# Altium PCB EPROM_Programmer.PcbDoc
Units mil, origin at the board's own origin, x right, y up, seen from the top; angles counter-clockwise.
Board outline 6000 x 4000 mil, 2 copper layers (Top Layer, Bottom Layer); 108 components, 102 nets, 375 pads, 0 vias.
Unrouted connection lines stored in the file: 239.
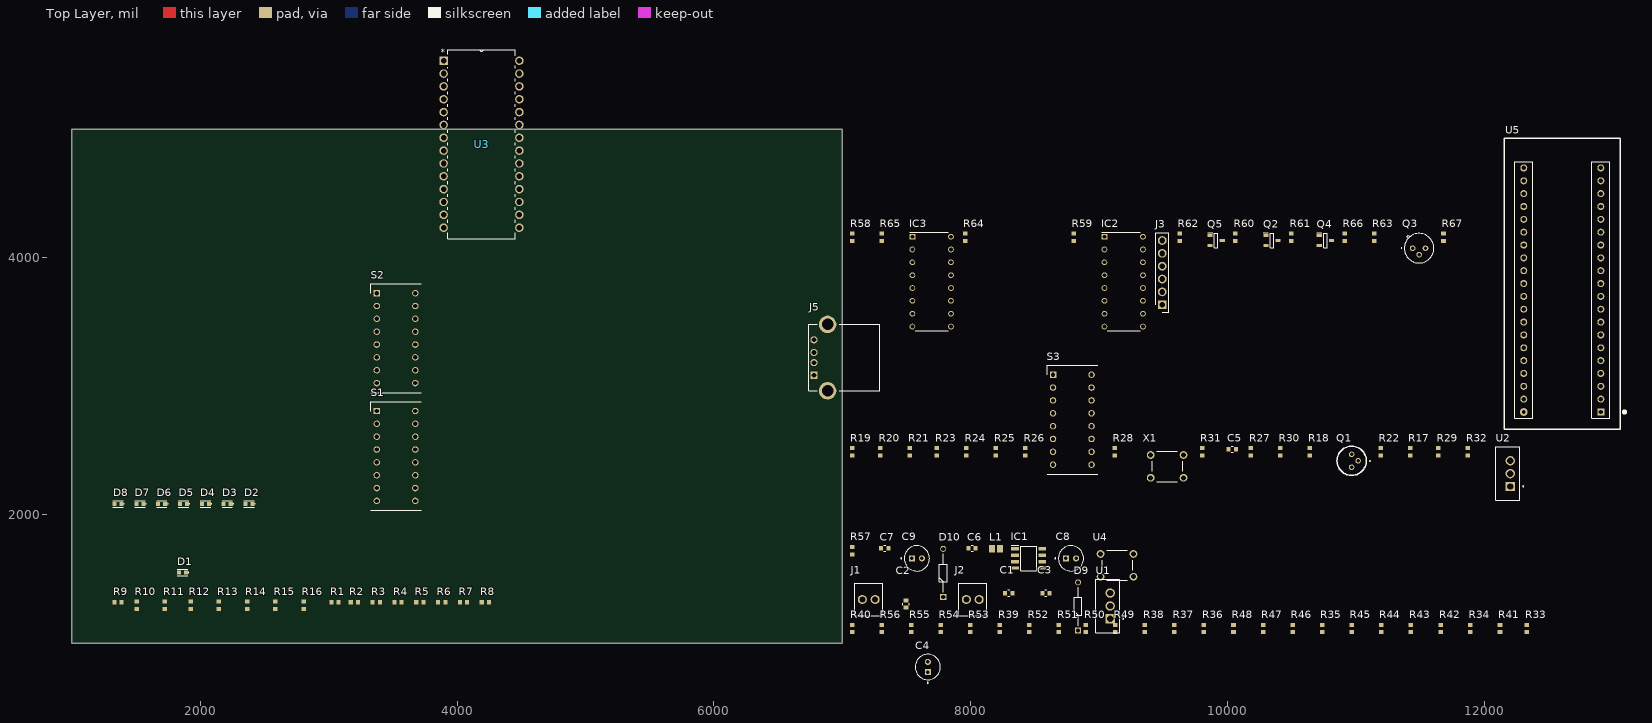
[diagram p0: Top Layer view]
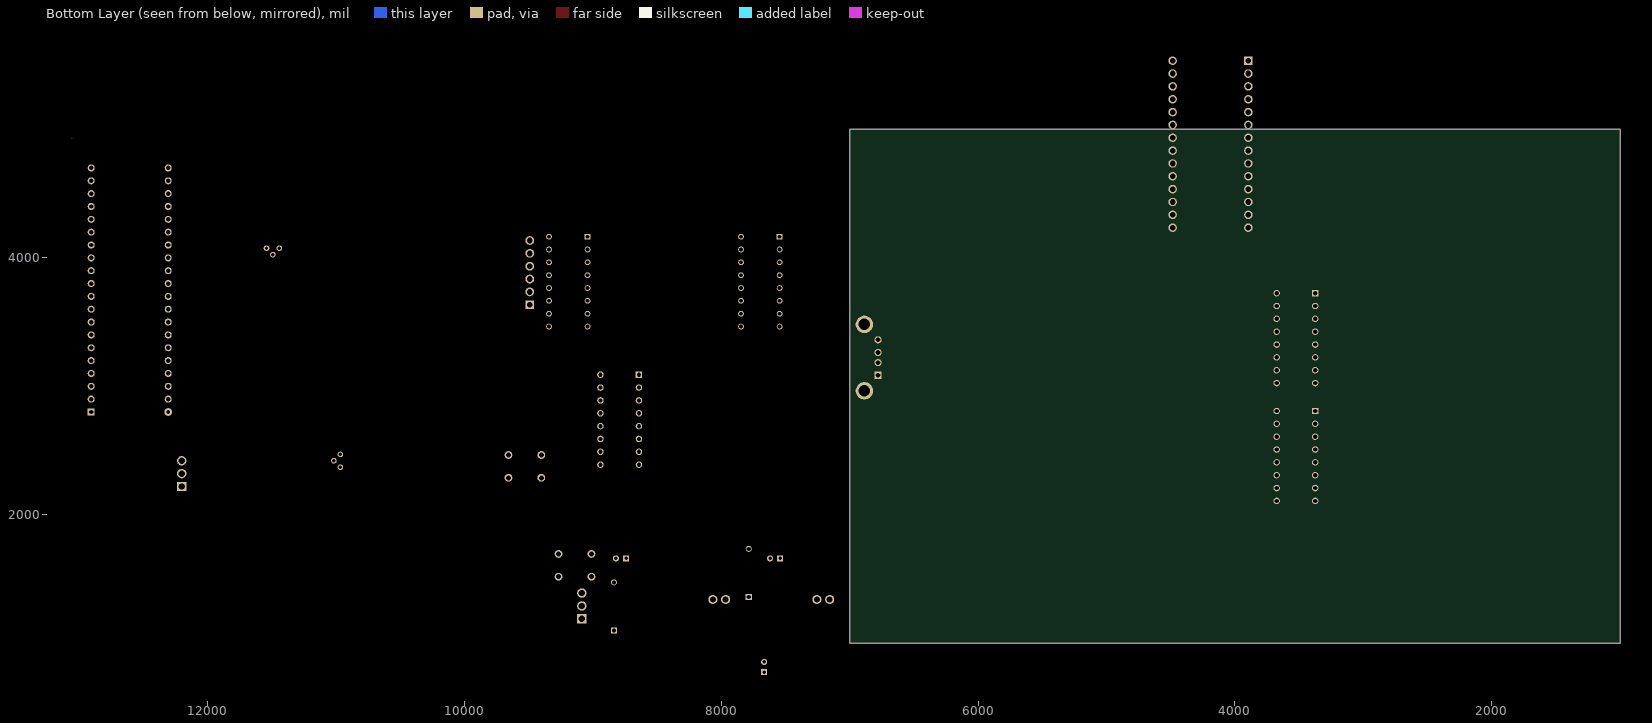
[diagram p1: Bottom Layer view, seen from below]

## Layer stack, top to bottom
Top Solder: solder mask 0.4, Solder Resist, Dk 3.5
Top Layer: signal copper 1.4
Dielectric 1: dielectric 12.6, FR-4, Dk 4.8
Bottom Layer: signal copper 1.4
Bottom Solder: solder mask 0.4, Solder Resist, Dk 3.5

## Board outline
1000,1000 7000,1000 7000,5000 1000,5000

## Design rules (kind name [scope] priority, off if disabled: settings)
Clearance [All] p1: gap=10 ignorepadtopadclearanceinfootprint=FALSE
PolygonConnect [All] p1: connectstyle=Relief reliefconductorwidth=10 reliefentries=4 polygonreliefangle="90 Angle" airgapwidth=10
RoutingVias [All] p1: holewidth=28 width=50 viastyle="Through Hole" minholewidth=28 minwidth=50 maxholewidth=28 maxwidth=50
SolderMaskExpansion [All] p1: expansion=4 istentingtop=FALSE
SupplyNets "Schematic Supply Nets_7" [InNet('+9v')] p1: voltage=0.000
SupplyNets "Schematic Supply Nets_6" [InNet('VIN')] p2: voltage=0.000
SupplyNets "Schematic Supply Nets_5" [InNet('+5 or +6')] p3: voltage=0.000
SupplyNets "Schematic Supply Nets_4" [InNet('VCC')] p4: voltage=0.000
SupplyNets "Schematic Supply Nets_3" [InNet('5V')] p5: voltage=0.000
SupplyNets "Schematic Supply Nets_2" [InNet('+12')] p6: voltage=0.000
SupplyNets "Schematic Supply Nets_1" [InNet('+5')] p7: voltage=0.000
Width [All] p1: maxlimit=10 minlimit=10 preferedwidth=10
30 further rules are at their usual default settings.

## Classes and differential pairs
component class EPROM_Programmer_3: IC2 IC3 J3 J5 Q2 Q3 Q4 Q5 R58 R59 R60 R61 R62 R63 R64 R65 R66 R67 U5
component class EPROM_Programmer_2: C3 C4 C5 C6 C7 C8 C9 D10 IC1 L1 Q1 R17 R18 R19 R20 R21 R22 R23 R24 R25 R26 R27 R28 R29 R30 R31 R32 R57 S3 U2 U4 X1
component class EPROM_Programmer: C1 C2 D1 D2 D3 D4 D5 D6 D7 D8 D9 J1 J2 R1 R2 R3 R4 R5 R6 R7 R8 R9 R10 R11 R12 R13 R14 R15 R16 R33 R34 R35 R36 R37 R38 R39 R40 R41 R42 R43 R44 R45 R46 R47 R48 R49 R50 R51 R52 R53 R54 R55 R56 S1 S2 U1 U3

## Components (designator, comment, footprint, x,y, rotation, side; value= is the part's Value field where it differs from the comment)
C1 "0.33uF" C0603 8295,1390 r0 top value=100pF
C2 "0.1uF" C0603 7495,1305 r90 top value=100pF
C3 "0.1uF" C0603 8585,1390 r0 top value=100pF
C4 "1uF" CAPPRD200W50D550H1250 7665,814.37 r90 top
C5 "10uF" C0603 10035,2510 r0 top value=100pF
C6 "47nF" C0603 8010,1740 r0 top value=100pF
C7 "1nF" C0603 7330,1740 r0 top value=100pF
C8 "33uF" CAPPRD200W50D550H1250 8780,1660 r0 top
C9 "33uF" CAPPRD200W50D550H1250 7580,1660 r0 top
D1 "LED_SMD" 0603_LED 1862.44,1550 r0 top value=RED
D2 "LED_SMD" 0603_LED 2380,2085 r0 top value=RED
D3 "LED_SMD" 0603_LED 2210,2085 r0 top value=RED
D4 "LED_SMD" 0603_LED 2040,2085 r0 top value=RED
D5 "LED_SMD" 0603_LED 1870,2085 r0 top value=RED
D6 "LED_SMD" 0603_LED 1700,2085 r0 top value=RED
D7 "LED_SMD" 0603_LED 1530,2085 r0 top value=RED
D8 "LED_SMD" 0603_LED 1360,2085 r0 top value=RED
D9 "SD103A-TR" DIOAD950W60L350D150 8835,1100 r90 top
D10 "1N5817" DIOAD950W60L350D150 7785,1360 r90 top
IC1 "MAX734CSA+" SOIC127P600X175-8N 8450,1660 r0 top
IC2 "74HC595N" DIP762W53P254L1902H420Q16N 9190,3815 r0 top
IC3 "74HC595N" DIP762W53P254L1902H420Q16N 7695,3815 r0 top
J1 "1546215-2" 15462152 7155,1340 r0 top
J2 "1546215-2" 15462152 7965,1340 r0 top
J3 "M20-9990645" HDRV6W66P0X254_1X6_1524X254X874P 9490,3635 r90 top
J5 "61400416021" 61400416021 7014.13,3223.66 r90 top
L1 "Inductor" 2029 8195,1735 r0 top value=18uH
Q1 "2N2222A" TO-18_4 10965,2420 r0 top
Q2 "2N2222A" SOT96P237X111-3N 10345,4135 r0 top
Q3 "2N2907A" CENTRAL_TO18 11490,4075 r0 top
Q4 "2N2222A" SOT96P237X111-3N 10760,4135 r0 top
Q5 "2N2222A" SOT96P237X111-3N 9910,4135 r0 top
R1 "Res1" R0603 3050,1320 r0 top value=1M
R2 "Res1" R0603 3200,1320 r0 top value=1M
R3 "Res1" R0603 3370,1320 r0 top value=1M
R4 "Res1" R0603 3540,1320 r0 top value=1M
R5 "Res1" R0603 3710,1320 r0 top value=1M
R6 "Res1" R0603 3880,1320 r0 top value=1M
R7 "Res1" R0603 4050,1320 r0 top value=1M
R8 "Res1" R0603 4220,1320 r0 top value=1M
R9 "Res1" R0603 1360,1320 r0 top value=1M
R10 "Res1" R0603 1505,1295 r90 top value=1M
R11 "Res1" R0603 1725,1295 r90 top value=1M
R12 "Res1" R0603 1925,1295 r90 top value=1M
R13 "Res1" R0603 2145,1295 r90 top value=1M
R14 "Res1" R0603 2365,1295 r90 top value=1M
R15 "Res1" R0603 2585,1295 r90 top value=1M
R16 "Res1" R0603 2805,1295 r90 top value=1M
R17 "Res1" R0603 11420,2490 r90 top value=220
R18 "Res1" R0603 10640,2490 r90 top value=820
R19 "Res1" R0603 7075,2490 r90 top value=1M
R20 "Res1" R0603 7295,2490 r90 top value=1M
R21 "Res1" R0603 7525,2490 r90 top value=1M
R22 "Res1" R0603 11190,2490 r90 top value=3.3K
R23 "Res1" R0603 7735,2490 r90 top value=1M
R24 "Res1" R0603 7965,2490 r90 top value=1M
R25 "Res1" R0603 8195,2490 r90 top value=1M
R26 "Res1" R0603 8425,2490 r90 top value=1M
R27 "Res1" R0603 10180,2490 r90 top value=10K
R28 "Res1" R0603 9120,2490 r90 top value=1M
R29 "Res1" R0603 11640,2490 r90 top value=2K
R30 "Res1" R0603 10410,2490 r90 top value=240
R31 "Res1" R0603 9800,2490 r90 top value=5K
R32 "Res1" R0603 11870,2490 r90 top value=3K
R33 "Res1" R0603 12330,1115 r90 top value=220
R34 "Res1" R0603 11890,1115 r90 top value=220
R35 "Res1" R0603 10735,1115 r90 top value=220
R36 "Res1" R0603 9815,1115 r90 top value=220
R37 "Res1" R0603 9585,1115 r90 top value=220
R38 "Res1" R0603 9355,1115 r90 top value=220
R39 "Res1" R0603 8225,1115 r90 top value=220
R40 "Res1" R0603 7075,1115 r90 top value=220
R41 "Res1" R0603 12120,1115 r90 top value=4.7k
R42 "Res1" R0603 11660,1115 r90 top value=4.7k
R43 "Res1" R0603 11425,1115 r90 top value=4.7k
R44 "Res1" R0603 11195,1115 r90 top value=4.7k
R45 "Res1" R0603 10965,1115 r90 top value=4.7k
R46 "Res1" R0603 10505,1115 r90 top value=4.7k
R47 "Res1" R0603 10275,1115 r90 top value=4.7k
R48 "Res1" R0603 10045,1115 r90 top value=4.7k
R49 "Res1" R0603 9125,1115 r90 top value=4.7k
R50 "Res1" R0603 8895,1115 r90 top value=4.7k
R51 "Res1" R0603 8685,1115 r90 top value=4.7k
R52 "Res1" R0603 8455,1115 r90 top value=4.7k
R53 "Res1" R0603 7995,1115 r90 top value=4.7k
R54 "Res1" R0603 7765,1115 r90 top value=4.7k
R55 "Res1" R0603 7535,1115 r90 top value=4.7k
R56 "Res1" R0603 7305,1115 r90 top value=4.7k
R57 "Res1" R0603 7075,1720 r90 top value=1M
R58 "Res1" R0603 7075,4160 r90 top value=120k
R59 "Res1" R0603 8800,4160 r90 top value=120k
R60 "Res1" R0603 10060,4160 r90 top value=4.7k
R61 "Res1" R0603 10495,4160 r90 top value=4.7k
R62 "Res1" R0603 9625,4160 r90 top value=4.7k
R63 "Res1" R0603 11140,4160 r90 top value=10k
R64 "Res1" R0603 7955,4160 r90 top value=20
R65 "Res1" R0603 7305,4160 r90 top value=20
R66 "Res1" R0603 10910,4160 r90 top value=4.7k
R67 "Res1" R0603 11680,4160 r90 top value=2.2k
S1 "418117270908" DIPS762W60P254L2132H695Q16N 3375,2807.62 r0 top
S2 "418117270908" DIPS762W60P254L2132H695Q16N 3375,3725 r0 top
S3 "418117270908" DIPS762W60P254L2132H695Q16N 8640,3090 r0 top
U1 "L7805CV" TO254P1054X470X1955-3 9085,1290 r90 top
U2 "LM317T" TO254P1054X470X1955-3 12200,2320 r90 top
U3 "M27C512-90F6" DIP254P1524X572-28 4485,4235 r0 top
U4 "TL082CP" 18259106 9010,1695 r0 top
U5 "STM32F103C6T6A_BLUE_PILL" TE_1-535541-8 12905,3750 r90 top
X1 "1825910-6" 18259106 9400,2465 r0 top

## Footprints (in the part's own frame and the unit in brackets; to place one, negate y for a bottom-side part, rotate by r counter-clockwise, add the part's x,y. Pads: shape width x height; smd on the part's side, far side on the other; paste and mask are expansions set on the pad)
0603_LED [mm] "LED"
  rect 0.8x0.8 smd: 1(-0.7,0) 2(0.7,0)
  silkscreen extent -1.02,-0.64 1.27,0.64, body extent -0.8,-0.4 0.8,0.4, height 0.6
2029 [mm] "Chip Inductor, Body 2.0x1.2mm, IPC High Density"
  rect 1.2x1.4 smd: 1(-0.8,0) 2(0.8,0)
  body extent -1.1,-0.7 1.1,0.7, height 0.55
15462152 [mm]
  round 1.8 hole 1.2: 1(0,0) 2(2.54,0)
  silkscreen extent -1.5,-3.25 4.04,3.25, body extent -1.46,-3.25 4,3.25, height 9.91
18259106 [mm]
  round 1.54 hole 0.99: 1(0,0) 2(6.5,0) 3(0,-4.5) 4(6.5,-4.5)
  silkscreen extent 0.25,-5.25 6.25,0.75, body extent -0.65,-5.25 7.15,0.74, height 5.64
61400416021 [mm] "USB 2.0 Type A Horizontal"
  rect 1.42x1.42 hole 0.92: 1(-3.5,5.99)
  round 1.42 hole 0.92: 2(-1,5.99) 3(1,5.99) 4(3.5,5.99)
  round 3.45 hole 2.3: Shell(-6.57,3.28) Shell(6.57,3.28)
  silkscreen extent -6.55,-7 6.55,7, body extent -8,-7 8,7, height 7.63
C0603 [mm] "Chip Capacitor, Body 1.6x0.8mm, IPC High Density"
  rect 0.8x0.9 smd: 1(-0.711,0) 2(0.711,0)
  silkscreen extent -0.2,-0.61 0.18,0.61, body extent -0.8,-0.4 0.8,0.4, height 0.9
CAPPRD200W50D550H1250 [mm]
  rect 1.208x1.208 hole 0.7: 1(-1,0)
  round 1.208 hole 0.7: 2(1,0)
  silkscreen extent -3.2,-2.5 2.5,2.5, body extent -2.5,-2.5 2.5,2.5, height 11.76
CENTRAL_TO18 [mm]
  round 1.1 hole 0.68: 1(-1.27,0) 2(0,-1.27) 3(1.27,0)
  silkscreen extent -3.53,-2.92 2.92,2.92, body extent -3.34,-2.92 2.91,3.34, height 5.33
DIOAD950W60L350D150 [mm]
  rect 1.2x1.2 hole 0.8: 1(0,0)
  round 1.2 hole 0.8: 2(9.5,0)
  silkscreen extent 0.95,-0.75 8.55,0.75, body extent -0.3,-0.84 9.8,0.84, height 1.7
DIP254P1524X572-28 [mil]
  rect 66x66 / inner round 66 / far side rect 66x66 hole 44: 1(-590,1300)
  round 66 hole 44: 2(-590,1200) 3(-590,1100) 4(-590,1000) 5(-590,900) 6(-590,800) 7(-590,700) 8(-590,600) 9(-590,500) 10(-590,400) 11(-590,300) 12(-590,200) 13(-590,100) 14(-590,0) 15(0,0) 16(0,100) 17(0,200) 18(0,300) 19(0,400) 20(0,500) 21(0,600) 22(0,700) 23(0,800) 24(0,900) 25(0,1000) 26(0,1100) 27(0,1200) 28(0,1300)
  silkscreen extent -558,-85 -32,1385, body extent -785,-865 150,1715, height 930
DIP762W53P254L1902H420Q16N [mm]
  rect 1.13x1.13 hole 0.73: 1(-3.81,8.89)
  round 1.13 hole 0.73: 2(-3.81,6.35) 3(-3.81,3.81) 4(-3.81,1.27) 5(-3.81,-1.27) 6(-3.81,-3.81) 7(-3.81,-6.35) 8(-3.81,-8.89) 9(3.81,-8.89) 10(3.81,-6.35) 11(3.81,-3.81) 12(3.81,-1.27) 13(3.81,1.27) 14(3.81,3.81) 15(3.81,6.35) 16(3.81,8.89)
  silkscreen extent -4.38,-9.75 3.24,9.75, body extent -3.94,-9.51 3.94,9.51, height 4.2
DIPS762W60P254L2132H695Q16N [mm]
  rect 1.275x1.275 hole 0.85: 1(0,0)
  round 1.275 hole 0.85: 2(0,-2.54) 3(0,-5.08) 4(0,-7.62) 5(0,-10.16) 6(0,-12.7) 7(0,-15.24) 8(0,-17.78) 9(7.62,-17.78) 10(7.62,-15.24) 11(7.62,-12.7) 12(7.62,-10.16) 13(7.62,-7.62) 14(7.62,-5.08) 15(7.62,-2.54) 16(7.62,0)
  silkscreen extent -1.19,-19.65 8.81,1.87, body extent -1.14,-19.55 8.76,1.77, height 10.55
HDRV6W66P0X254_1X6_1524X254X874P [mm]
  rect 1.725x1.725 hole 1.15: 1(0,0)
  round 1.725 hole 1.15: 2(2.54,0) 3(5.08,0) 4(7.62,0) 5(10.16,0) 6(12.7,0)
  silkscreen extent -1.52,-1.32 14.22,1.32, body extent -1.27,-1.27 13.97,1.27, height 8.74
R0603 [mm] "Chip Capacitor, Body 1.6x0.8mm, IPC High Density"
  rect 0.8x0.9 smd: 1(-0.711,0) 2(0.711,0)
  body extent -0.8,-0.43 0.84,0.41, height 0.41
SOIC127P600X175-8N [mm]
  rect 1.525x0.65 smd: 1(-2.712,1.905) 2(-2.712,0.635) 3(-2.712,-0.635) 4(-2.712,-1.905) 5(2.712,-1.905) 6(2.712,-0.635) 7(2.712,0.635) 8(2.712,1.905)
  silkscreen extent -3.47,-2.45 1.6,2.58, body extent -3,-2.45 3,2.45, height 1.75
SOT96P237X111-3N [mm]
  rect 1x0.6 smd: 1(-1.2,0.955) 2(-1.2,-0.955) 3(1.2,0)
  silkscreen extent -1.7,-1.46 0.35,1.51, body extent -1.18,-1.46 1.18,1.46, height 1.11
TE_1-535541-8 [mm]
  rect 1.388x1.388 hole 0.88: 1(-24.13,0)
  round 1.388 hole 0.88: 2(-21.59,0) 3(-19.05,0) 4(-16.51,0) 5(-13.97,0) 6(-11.43,0) 7(-8.89,0) 8(-6.35,0) 9(-3.81,0) 10(-1.27,0) 11(1.27,0) 12(3.81,0) 13(6.35,0) 14(8.89,0) 15(11.43,0) 16(13.97,0) 17(16.51,0) 18(19.05,0) 19(21.59,0) 20(24.13,0) 22(-21.59,15.24) 23(-19.05,15.24) 24(-16.51,15.24) 25(-13.97,15.24) 26(-11.43,15.24) 27(-8.89,15.24) 28(-6.35,15.24) 29(-3.81,15.24) 30(-1.27,15.24) 31(1.27,15.24) 32(3.81,15.24) 33(6.35,15.24) 34(8.89,15.24) 35(11.43,15.24) 36(13.97,15.24) 37(16.51,15.24) 38(19.05,15.24) 39(21.59,15.24) 40(24.13,15.24)
  round 1.524 hole 0.762: 21(-24.13,15.24)
  Top Layer lines w0.254: 29.972,-3.81 29.949,-3.833
  silkscreen extent -27.56,-4.95 29.97,19.05, body extent -27.56,-3.81 30,19.05, height 19.17
TO254P1054X470X1955-3 [mm]
  rect 1.86x1.86 / inner round 1.86 / far side rect 1.86x1.86 hole 1.24: 1(-2.54,0)
  round 1.86 hole 1.24: 2(0,0) 3(2.54,0)
  silkscreen extent -5.27,-2.64 5.27,2.86, body extent -5.08,-1.49 5.08,2.71, height 22.86
TO-18_4 [mm]
  round 1.1 hole 0.68: 1(1.27,0) 2(0,1.27) 3(0,-1.27)
  silkscreen extent -2.9,-2.9 3.67,2.9, body extent -3.27,-3.3 2.9,2.86, height 6.4

## Part data
C1 C2 C3 C5 C6 C7: library part Cap, "Capacitor", PackageDescription="Radial Cap, Thru-Hole; 2 Leads; 0.3 in Pin Spacing", PackageReference=RAD-0.3
C4 C8 C9: library part UVR1C330MDD, "33ÂµF 16V Aluminum Electrolytic Capacitors Radial, Can 2000 Hrs @ 85Â°C", Package="Radial Nichicon", Availability=Good, Check_prices=https://www.snapeda.com/parts/UVR1C330MDD/Nichicon/view-part/859142/?ref=eda, MF=Nichicon, MP=UVR1C330MDD, Price=None, Purchase-URL=https://pricing.snapeda.com/search/part/UVR1C330MDD/?ref=eda, SnapEDA_Link=https://www.snapeda.com/parts/UVR1C330MDD/Nichicon/view-part/859142/?ref=snap
D1 D2 D3 D4 D5 D6 D7 D8: "LED RED CLEAR 0603 SMD", Digikey Part Number=160-1447-1-ND, Manufacturer Part Number=LTST-C191KRKT, PackageDescription="1.60mm L x 0.80mm W", PackageReference="0603 (1608 Metric)"
D9: "Schottky Diode", Manufacturer_Name=Vishay, Mouser Part Number=625-SD103A, Arrow Part Number=SD103A-TR, Arrow Price/Stock=https://www.arrow.com/en/products/sd103a-tr/vishay?region=nac, Datasheet Link=https://componentsearchengine.com/Datasheets/5/SD103A-TR.pdf, Manufacturer_Part_Number=SD103A-TR, Mouser Price/Stock=https://www.mouser.co.uk/ProductDetail/Vishay-Semiconductors/SD103A-TR?qs=RwahMLkpD2urFD%2FzZdGOBw%3D%3D
D10: library part SD103A-TR, "Schottky Diode", Manufacturer_Name=Vishay, Mouser Part Number=625-SD103A, Arrow Part Number=SD103A-TR, Arrow Price/Stock=https://www.arrow.com/en/products/sd103a-tr/vishay?region=nac, Datasheet Link=https://componentsearchengine.com/Datasheets/5/SD103A-TR.pdf, Manufacturer_Part_Number=SD103A-TR, Mouser Price/Stock=https://www.mouser.co.uk/ProductDetail/Vishay-Semiconductors/SD103A-TR?qs=RwahMLkpD2urFD%2FzZdGOBw%3D%3D
IC1: "Integrated Circuit", Manufacturer_Name="Analog Devices", Mouser Part Number=700-MAX734CSA, Arrow Part Number=MAX734CSA+, Arrow Price/Stock=https://www.arrow.com/en/products/max734csa/analog-devices?region=europe, Datasheet Link=https://datasheets.maximintegrated.com/en/ds/MAX734.pdf, Height=1.75mm, Manufacturer_Part_Number=MAX734CSA+, Mouser Price/Stock=https://www.mouser.co.uk/ProductDetail/Analog-Devices-Maxim-Integrated/MAX734CSA%2b?qs=1THa7WoU59E%252BWIOpGpIp2A%3D%3D
IC2 IC3: "Integrated Circuit", Manufacturer_Name=NXP, Datasheet Link=https://datasheet.datasheetarchive.com/originals/distributors/SFDatasheet-4/sf-00080087.pdf, Height=4.2mm, Manufacturer_Part_Number=74HC595N
J1 J2: "Connector", Manufacturer_Name="TE Connectivity", Mouser Part Number=571-1546215-2, Arrow Part Number=1546215-2, Arrow Price/Stock=https://www.arrow.com/en/products/1546215-2/te-connectivity?region=nac, Datasheet Link=https://www.te.com/commerce/DocumentDelivery/DDEController?Action=srchrtrv&DocNm=1-1773458-1_EURO_STYLE_QRG&DocType=Data%20Sheet&DocLang=English&PartCntxt=1546215-2&DocFormat=pdf, Height=10.3mm, Manufacturer_Part_Number=1546215-2, Mouser Price/Stock=https://www.mouser.co.uk/ProductDetail/TE-Connectivity/1546215-2?qs=Lxq28tKK6BPmJFoAOY7Ljw%3D%3D
J3: "Connector", Manufacturer_Name=Harwin, Mouser Part Number=855-M20-9990645, Datasheet Link=https://cdn.harwin.com/pdfs/M20-999.pdf, Height=8.74mm, Manufacturer_Part_Number=M20-9990645, Mouser Price/Stock=https://www.mouser.co.uk/ProductDetail/Harwin/M20-9990645?qs=Jph8NoUxIfWe7BJQOhiVRg%3D%3D
J5: library part CMP-1502-03227-2, Color=White, Contact Resistance=20mΩ, Current Rating=1.5A, Flammability Rating="UL94 V-0", Insulation Resistance=1GΩ, Max Operating Temperature=105°C, Min Operating Temperature=-40°C, Operating Supply Voltage=30V, Connector Type=USB, Contact Material=Copper, Contact Plating=Gold, Gender=Receptacle, Insulation Material=PBT, Lead Free="Lead Free", Length=15.8mm, Mount="Horizontal, Through Hole", NexarPartId=21041530, Number of Contacts=4, Number of Pins=4, Number of Ports=1, Number of Positions=4, Orientation=Horizontal, REACH SVHC=Unknown, RoHS=Compliant, Termination=Solder, USB Standard="USB 2.0", Voltage Rating=30V, Voltage Rating (DC)=30V, Width=14.4mm
Q1: "Transistor BJT NPN", Manufacturer_Name=STMicroelectronics, Mouser Part Number=511-2N2222A, Datasheet Link=https://datasheet.datasheetarchive.com/originals/distributors/Datasheets-25/DSA-481035.pdf, Manufacturer_Part_Number=2N2222A, Mouser Price/Stock=https://www.mouser.co.uk/ProductDetail/STMicroelectronics/2N2222A?qs=UMEuL5FsraBzcgM1cdcH3A%3D%3D
Q2 Q4 Q5: "Boitier SOT23 -v MMBT2222ALT3G", Arrow Part Number=MMBT2222ALT3G, Manufacturer_Name=onsemi, Mouser Part Number=863-MMBT2222ALT3G, Arrow Price/Stock=https://www.arrow.com/en/products/mmbt2222alt3g/on-semiconductor?utm_currency=USD&region=nac, Datasheet Link=http://www.onsemi.com/pub/Collateral/MMBT2222LT1-D.PDF, Geometry.Height=1.11mm, Manufacturer_Part_Number=MMBT2222ALT3G, Mouser Price/Stock=https://www.mouser.co.uk/ProductDetail/onsemi/MMBT2222ALT3G?qs=R2UZ7gjkEjJUeR4kVVA5Qw%3D%3D
Q3: "Transistor BJT PNP", Manufacturer_Name="Central Semiconductor", Mouser Part Number=610-2N2907A, Datasheet Link=https://www.centralsemi.com/get_document.php?cmp=1&mergetype=pd&mergepath=pd&pdf_id=2n2906.PDF, Manufacturer_Part_Number=2N2907A, Mouser Price/Stock=https://www.mouser.com/Search/Refine.aspx?Keyword=610-2N2907A
R1 R2 R3 R4 R5 R6 R7 R8 R9 R10 R11 R12 R13 R14 R15 R16 R17 R18 R19 R20 R21 R22 R23 R24 R25 R26 R27 R28 R29 R30 R31 R32 R33 R34 R35 R36 R37 R38 R39 R40 R41 R42 R43 R44 R45 R46 R47 R48 R49 R50 R51 R52 R53 R54 R55 R56 R57 R58 R59 R60 R61 R62 R63 R64 R65 R66 R67: "Resistor", PackageDescription="Axial Device, Thru-Hole; 2 Leads; 0.3 in Pin Spacing", PackageReference=AXIAL-0.3
S1 S2 S3: "Switch", Manufacturer_Name="Wurth Elektronik", Mouser Part Number=710-418117270908, Datasheet Link=https://www.we-online.com/catalog/datasheet/418117270908.pdf, Height=6.95mm, Manufacturer_Part_Number=418117270908, Mouser Price/Stock=https://www.mouser.co.uk/ProductDetail/Wurth-Elektronik/418117270908?qs=wr8lucFkNMXJyYOZ9v4znw%3D%3D
U1: library part CMP-0244-00483-1, "Positive Voltage Regulator, 5V, 3-Pin TO-220", ComponentLink1Description="Manufacturer URL", ComponentLink1URL=http://www.st.com, ComponentLink2Description=Datasheet, ComponentLink2URL=http://www.st.com/internet/com/TECHNICAL_RESOURCES/TECHNICAL_LITERATURE/DATASHEET/CD00000444.pdf, ComponentLink3Description="Package Specification", ComponentLink3URL=http://www.st.com/internet/com/TECHNICAL_RESOURCES/TECHNICAL_LITERATURE/PACKAGE_INFORMATION/CD00004649.pdf, DatasheetVersion=16/11/2011, PackageDescription="TO, Thru-Hole, Vertical, Heatsink Mounted; 3 In-Line Leads; Pitch 2.54 mm", PackageReference=TO220, PackageVersion=ver3.0
U2: library part CMP-0244-00444-1, "1.5A, 1.2V to 37V Adjustable Voltage Regulator, 3-Pin TO-220", ComponentLink1Description="Manufacturer URL", ComponentLink1URL=http://www.st.com, ComponentLink2Description=Datasheet, ComponentLink2URL=http://www.st.com/internet/com/TECHNICAL_RESOURCES/TECHNICAL_LITERATURE/DATASHEET/CD00000455.pdf, ComponentLink3Description="Package Specification", ComponentLink3URL=http://www.st.com/internet/com/TECHNICAL_RESOURCES/TECHNICAL_LITERATURE/PACKAGE_INFORMATION/CD00004649.pdf, DatasheetVersion=1/11/2011, PackageDescription="TO, Thru-Hole, Vertical, Heatsink Mounted; 3 In-Line Leads; Pitch 2.54 mm", PackageReference=TO-220, PackageVersion=2011
U3: "EPROM - UV Memory IC 512Kb (64K x 8) Parallel 90 ns 28-CDIP Frit Seal with Window", Package="CDIP-28 STMicroelectronics", Check_prices=https://www.snapeda.com/parts/M27C512-90F6/STMicroelectronics/view-part/?ref=eda, MF=STMicroelectronics, MP=M27C512-90F6, SnapEDA_Link=https://www.snapeda.com/parts/M27C512-90F6/STMicroelectronics/view-part/?ref=snap
U4: library part CMP-0055-00158-5, "JFET-Input Operational Amplifier, 7 to 36 V, 0 to 70 degC, 8-pin DIP (P8), Pb-Free (RoHS)", Manufacturer="Texas Instruments", Rating=Catalog, Total Supply Voltage(Max)(+5V is 5, +/-5V is 10)=36, Total Supply Voltage(Min)(+5V is 5, +/-5V is 10)=7, CMRR(Min)(dB)=70, Code_JEDEC=MS-001, ComponentLink1Description="Manufacturer URL", ComponentLink1URL=http://www.ti.com/, ComponentLink2Description=Datasheet, ComponentLink2URL=http://www.ti.com/lit/ds/symlink/tl082.pdf, ComponentLink3Description="Package Specification", ComponentLink3URL=http://www.ti.com/litv/pdf/mpdi001b, DatasheetVersion=SLOS081G, Eco-Plan="Pb-Free (RoHS)", GBW(Typ)(MHz)=3, IIB(Max)(pA)=400, Iq per channel(Max)(mA)=2.8, Mounting Technology="Through Hole", Number of Channels=2, Offset Drift(Typ)(uV/C)=18, PackageDescription="8-Pin Plastic In-Line, Body 9.59 x 6.35 mm, Pitch 2.54 mm", PackageReference=P0008A, PackageVersion="4040082/E, 04/2010", PartNumber=TL082CP, Slew Rate(Typ)(V/us)=13, Sub Family="General Purpose Amplifier, High Supply Voltage Amplifier (>=30V)", Vio (25C)(Max)(mV)=15, Vn at 1kHz(Typ)(nV/rtHz)=18
U5: library part STM32F103_BLUE_PILL
X1: "Body Features: Product Orientation Vertical", Manufacturer_Name="TE Connectivity", Mouser Part Number=650-1825910-6, Arrow Part Number=1825910-6, Arrow Price/Stock=https://www.arrow.com/en/products/1825910-6/te-connectivity?region=nac, Datasheet Link=https://www.te.com/commerce/DocumentDelivery/DDEController?Action=srchrtrv&DocNm=1308111-1_SWITCHES_CORE_PROGRAM_CATALOG&DocType=Catalog%20Section&DocLang=English&PartCntxt=1825910-6&DocFormat=pdf, Geometry.Height=5.3mm, Manufacturer_Part_Number=1825910-6, Mouser Price/Stock=https://www.mouser.co.uk/ProductDetail/TE-Connectivity/1825910-6?qs=A6cQTCBcXncisYDS1KbpGA%3D%3D
L1: PackageDescription="Chip Inductor", PackageReference=0402-A

## Nets (pads, with @x,y where several pads share a name; then routed paths per layer and width w, separated by ;. In a path a pad name is that pad's centre, name@x,y a point inside that pad or via, vN(x,y) a via of type N, cw(c..) or ccw(c..) an arc to the next point about the centre after c; other vN are vias at no path point)
5V: C2.1 J2.1 U1.3
+5: C1.2 C2.2 C3.2 C6.2 C8.2 C9.2 D1.2 D2.2 D3.2 D4.2 D5.2 D6.2 D7.2 D8.2 IC1.5 IC2.8 IC2.16 IC3.8 IC3.16 J1.1 J2.2 J3.6 J5.4 J5.Shell Q1.3 Q2.2 Q4.2 Q5.2 R1.2 R2.2 R3.2 R4.2 R5.2 R6.2 R7.2 R8.2 R9.2 R10.2 R11.2 R12.2 R13.2 R14.2 R15.2 R16.2 R18.2 R19.2 R20.2 R21.2 R23.2 R24.2 R25.2 R26.1 R28.1 R29.2 R30.2 R31.2 R32.1 R57.2 R58.2 R59.1 R67.2 S1.1 S1.2 S1.3 S1.4 S1.5 S1.6 S1.7 S1.8 S2.1 S2.2 S2.3 S2.4 S2.5 S2.6 S2.7 S2.8 S3.1 S3.2 S3.3 S3.4 S3.5 S3.6 S3.7 S3.8 U1.2 U3.14 U4.4 U5.19 X1.3
"+5 or +6": C4.1 R17.2 U2.2 U3.28
+9v: C3.1 U2.3
+12: C7.2 C9.1 D10.1 IC1.7 Q3.3 R63.2
NetC1_1: C1.1 D9.1 U1.1
NetC5_1: C5.1 R30.1 U4.3
NetC5_2: C5.2 R31.1 X1.1
NetC6_1: C6.1 IC1.3
NetC7_1: C7.1 IC1.4
NetD1_1: D1.1 R33.1
NetD2_1: D2.1 R34.1
NetD3_1: D3.1 R35.1
NetD4_1: D4.1 R36.1
NetD5_1: D5.1 R37.1
NetD6_1: D6.1 R38.1
NetD7_1: D7.1 R39.1
NetD8_1: D8.1 R40.1
NetD10_2: D10.2 IC1.6 L1.2
NetIC1_1: IC1.1 R25.1 S3.14
NetIC1_8: IC1.8 L1.1
NetIC2_1: IC2.1 R55.2 U3.9
NetIC2_2: IC2.2 R54.2 U3.8
NetIC2_3: IC2.3 R53.2 U3.7
NetIC2_4: IC2.4 R52.2 U3.6
NetIC2_5: IC2.5 R51.2 U3.5
NetIC2_6: IC2.6 R50.2 U3.4
NetIC2_7: IC2.7 R49.2 U3.3
NetIC2_9: IC2.9 IC3.14
NetIC2_10: IC2.10 IC3.10 R58.1 U5.32
NetIC2_11: IC2.11 IC3.11 U5.31
NetIC2_12: IC2.12 IC3.12 U5.30
NetIC2_13: IC2.13 IC3.13 R59.2
NetIC2_14: IC2.14 U5.28
NetIC2_15: IC2.15 R56.2 U3.10
NetIC3_1: IC3.1 R47.2 U3.24
NetIC3_2: IC3.2 R46.2 U3.21
NetIC3_3: IC3.3 R45.2 U3.23
NetIC3_4: IC3.4 R44.2 U3.2
NetIC3_5: IC3.5 R43.2 U3.26
NetIC3_6: IC3.6 R42.2 U3.27
NetIC3_7: IC3.7 R41.2 U3.1
NetIC3_15: IC3.15 R48.2 U3.25
NetJ3_1: J3.1
NetJ3_2: J3.2
NetJ3_3: J3.3 U5.12
NetJ3_4: J3.4
NetJ3_5: J3.5
NetJ4_2: R57.1
NetJ5_1: J5.1 U5.18
NetJ5_2: J5.2 R64.2
NetJ5_3: J5.3 R65.2
NetQ1_1: Q1.1 R27.2
NetQ1_2: Q1.2 R22.2
NetQ2_1: Q2.1 R60.1
NetQ2_3: Q2.3 Q4.1 R61.1
NetQ3_1: Q3.1 Q5.3 R67.1
NetQ3_2: Q3.2 R63.1 R66.2
NetQ4_3: Q4.3 R66.1
NetQ5_1: Q5.1 R62.1
NetR1_1: R1.1 R48.1 S1.9
NetR2_1: R2.1 R47.1 S1.10
NetR3_1: R3.1 R46.1 S1.11
NetR4_1: R4.1 R45.1 S1.12
NetR5_1: R5.1 R44.1 S1.13
NetR6_1: R6.1 R43.1 S1.14
NetR7_1: R7.1 R42.1 S1.15
NetR8_1: R8.1 R41.1 S1.16
NetR9_1: R9.1 R56.1 S2.9
NetR10_1: R10.1 R55.1 S2.10
NetR11_1: R11.1 R54.1 S2.11
NetR12_1: R12.1 R53.1 S2.12
NetR13_1: R13.1 R52.1 S2.13
NetR14_1: R14.1 R51.1 S2.14
NetR15_1: R15.1 R50.1 S2.15
NetR16_1: R16.1 R49.1 S2.16
NetR17_1: R17.1 R18.1 R22.1 U2.1
NetR19_1: R19.1 S3.9
NetR20_1: R20.1 S3.10
NetR21_1: R21.1 S3.11
NetR23_1: R23.1 S3.12
NetR24_1: R24.1 S3.13
NetR26_2: R26.2 S3.15
NetR27_1: R27.1
NetR28_2: R28.2 S3.16
NetR29_1: R29.1 R32.2 U4.2
NetR33_2: R33.2 U3.11
NetR34_2: R34.2 U3.12
NetR35_2: R35.2 U3.13
NetR36_2: R36.2 U3.15
NetR37_2: R37.2 U3.16
NetR38_2: R38.2 U3.17
NetR39_2: R39.2 U3.18
NetR40_2: R40.2 U3.19
NetR60_2: R60.2 R62.2 U5.36
NetR61_2: R61.2 U5.35
NetR64_1: R64.1 U5.8
NetR65_1: R65.1 U5.9
NetU3_20: U3.20 U4.1
NetU4_8: 
VCC: D9.2 J1.2
VIN: C8.1
pads on no net: C4.2 IC1.2 IC3.9 U3.22 U5.1 U5.2 U5.3 U5.4 U5.5 U5.6 U5.7 U5.10 U5.11 U5.13 U5.14 U5.15 U5.16 U5.17 U5.20 U5.21 U5.22 U5.23 U5.24 U5.25 U5.26 U5.27 U5.29 U5.33 U5.34 U5.37 U5.38 U5.39 U5.40 X1.2 X1.4

## Text inside footprints (layer, text, board x,y; h text height)
U3: Top Overlay "*" at 3872,5579 h50; Mechanical 13 "*" at 3872,5579 h50